# Altium PCB PCB1.PcbDoc (part 2 of 2)
Units mm, origin at the board's own origin, x right, y up, seen from the top; angles counter-clockwise.
Board outline 100 x 100 mm, 4 copper layers (Top Layer, GND, PWR, Bottom Layer), stack 0.603 mm thick; 73 components, 79 nets, 277 pads, 87 vias.
Unrouted connection lines stored in the file: 25.
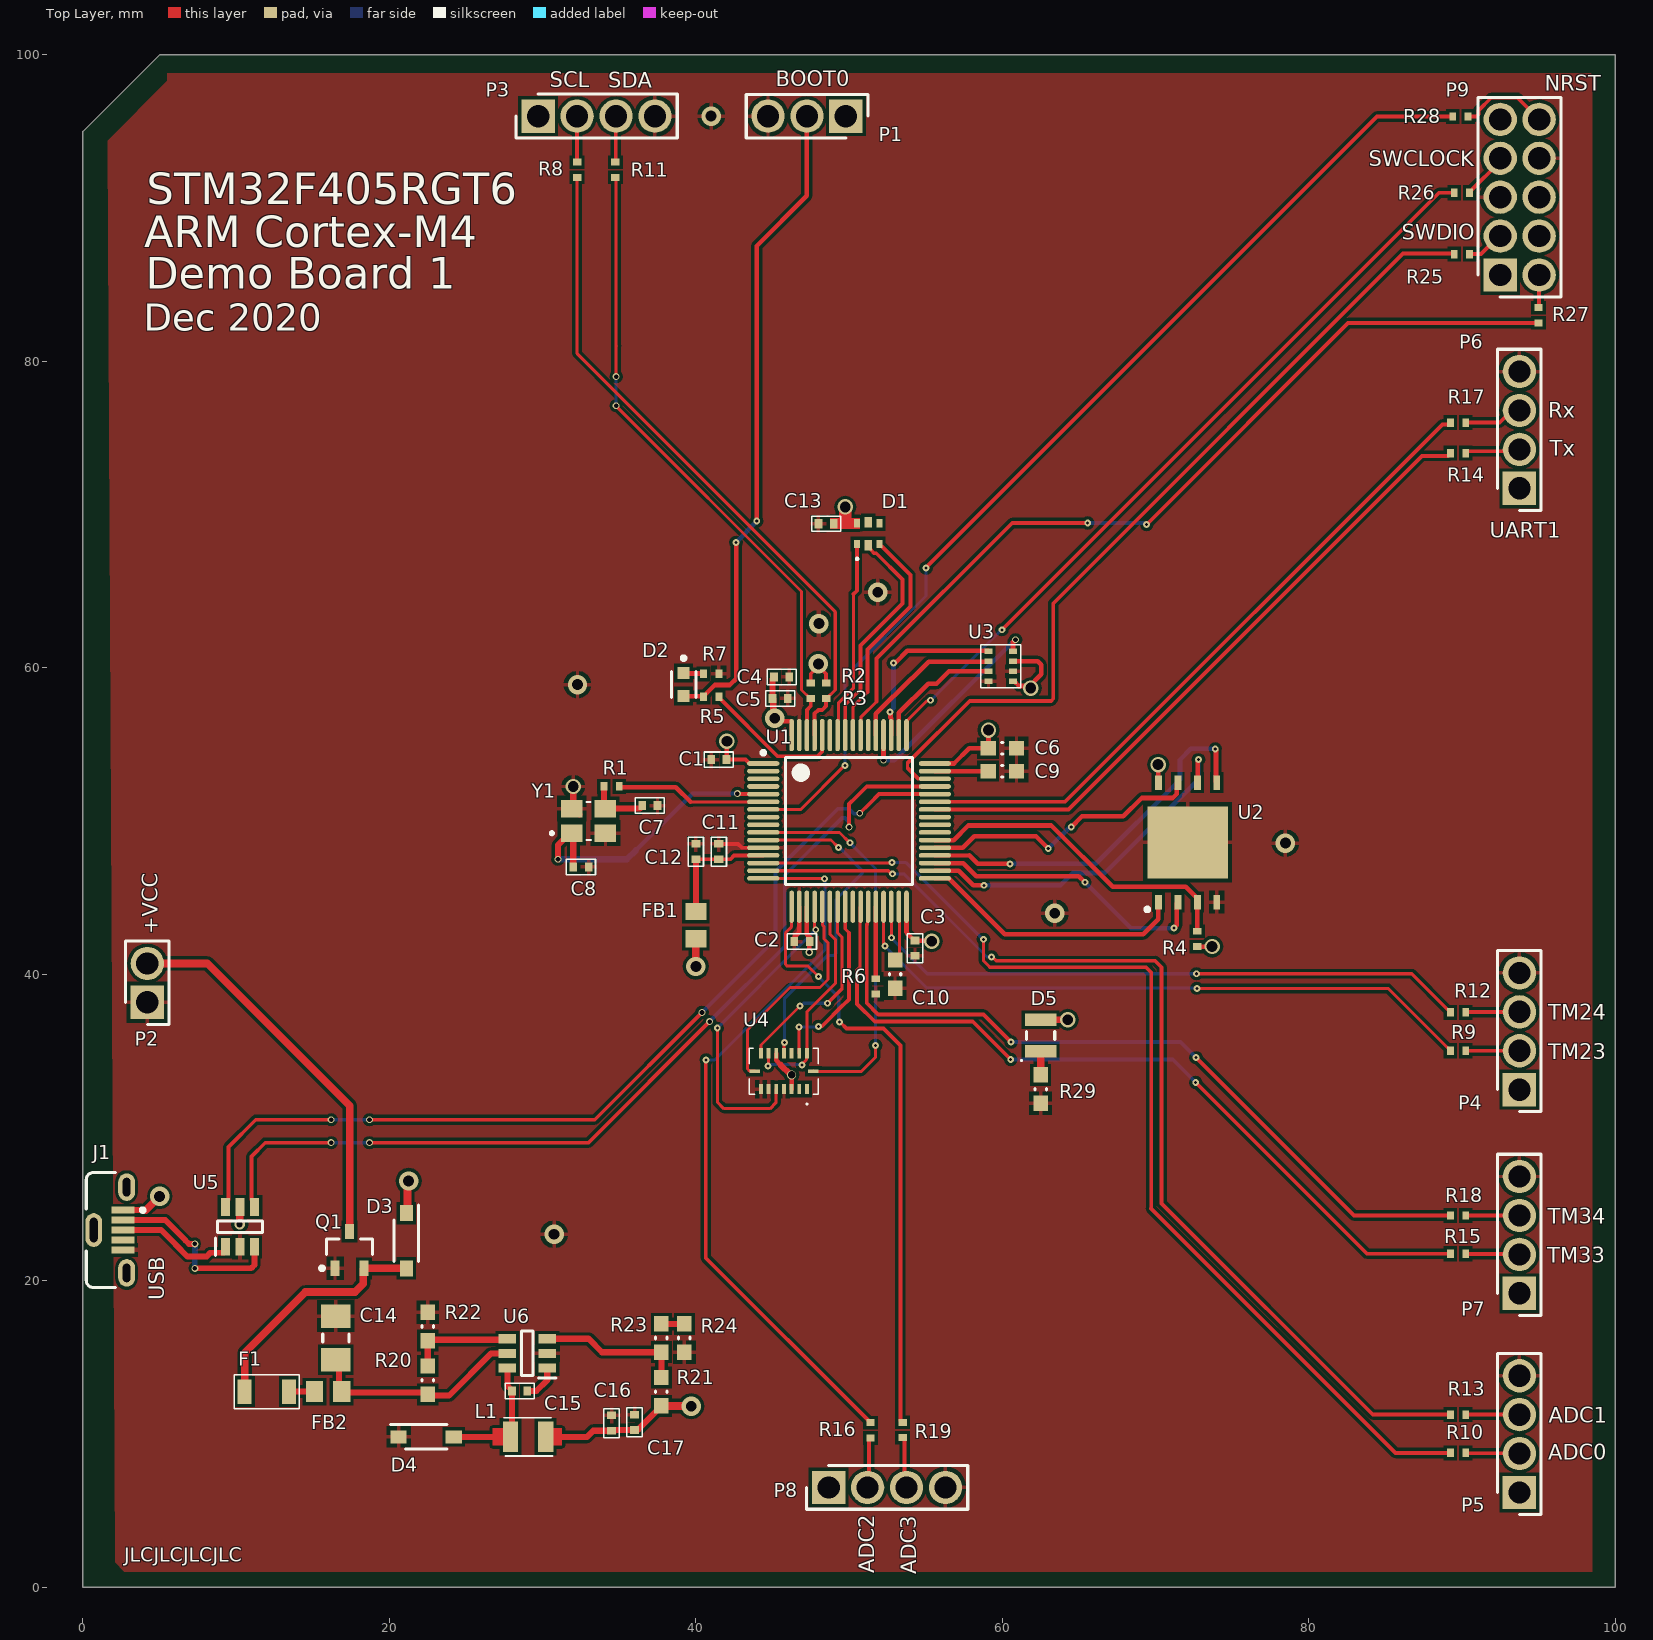
[diagram p0: Top Layer view]

## Polygon pours and split planes (outlines as drawn) (continued)
GND on GND (split plane): 38.304,53.196 38.682,52.818 38.697,52.808 38.707,52.801 38.736,52.795 43.196,52.795 44.124,51.868 44.124,50.876 41.237,50.876 41.208,50.871 41.196,50.862 41.183,50.854 40.393,50.063 40.008,49.679 38.196,47.867 38.179,47.842 38.174,47.813 38.174,46.076 30.076,46.076 30.076,49.674 30.174,49.674 30.174,46.237 30.179,46.207 30.196,46.183 30.221,46.166 30.25,46.16 37.954,46.16 37.983,46.166 38.008,46.183 38.025,46.207 38.031,46.237 38.031,47.922 40.805,50.697 41.009,50.901 41.01,50.901 41.035,50.918 41.089,50.972 43.9,50.972 43.929,50.978 43.954,50.994 43.971,51.019 43.976,51.049 43.976,51.798 43.971,51.827 43.962,51.84 43.954,51.852 43.252,52.554 43.227,52.571 43.198,52.576 38.707,52.576 37.754,53.529 37.729,53.546 37.7,53.551 30.25,53.551 30.221,53.546 30.196,53.529 30.179,53.504 30.174,53.475 30.174,50.326 30.076,50.326 30.076,53.624 37.876,53.624
GND on GND (split plane): 99.49,0.51 0.51,0.51 0.51,94.789 5.211,99.49 99.49,99.49
+5V on PWR (split plane): 28.748,21.896 28.748,16.604 23.396,11.252 1.752,11.252 1.752,28.248 22.396,28.248
+3V3 on PWR (split plane): 99.49,0.51 0.51,0.51 0.51,94.789 5.211,99.49 99.49,99.49

## Other copper
Top Layer:
  region net +3V3: 48.774,69.075 50.7,69.075 50.7,69.761 50.136,69.762 50.136,70.325 50.136,70.725 49.35,70.725 49.35,70.325 49.35,69.761 48.761,69.761
GND (plane layer: these items are gaps in the copper):
  lines w0.15: 30,46 38.25,46 38.25,47.813 40.062,49.625 40.447,50.009 41.237,50.8 41.523,50.8 42.46,50.8 44.2,50.8 44.2,51.9 43.228,52.872 38.736,52.872 38.358,53.25 37.908,53.7 30,53.7 30,50.25 30.25,50.25 30.25,53.475 37.7,53.475 38.675,52.5 43.198,52.5 43.9,51.798 43.9,51.049 41.058,51.049 40.981,50.972 40.972,50.972 40.751,50.751 37.954,47.954 37.954,46.237 36.063,46.237 30.25,46.237 30.25,49.75 30,49.75 30,46
PWR (plane layer: these items are gaps in the copper):
  lines w0.5: 1.5,11 23.5,11 29,16.5 29,22 22.5,28.5 1.5,28.5 1.5,11

## Silkscreen, mask and mechanical layers (free items; w line width, h text height)
Top Overlay:
  text "BOOT0" at 45.218,97.964 h1
  text "SCL" at 30.459,97.871 h1
  text "SDA" at 34.269,97.844 h1
  text "NRST" at 95.413,97.671 h1
  text "SWCLOCK" at 83.921,92.715 h1
  text "STM32F405RGT6" at 4.161,89.573 h3.5
  text "SWDIO" at 86.076,87.935 h1
  text "ARM Cortex-M4" at 3.995,86.764 h3.5
  text "Demo Board 1" at 4.089,84.058 h3.5
  text "Dec 2020" at 3.973,81.403 h3
  text "Rx" at 95.65,76.3 h1
  text "Tx" at 95.746,73.851 h1
  text "UART1" at 91.814,68.47 h1
  text "+VCC" at 4.896,42.595 h1 r90
  text "TM24" at 95.622,37.02 h1
  text "TM23" at 95.634,34.439 h1
  text "TM34" at 95.615,23.715 h1
  text "TM33" at 95.574,21.159 h1
  text "USB" at 5.308,18.722 h1 r90
  text "ADC1" at 95.661,10.706 h1
  text "ADC0" at 95.642,8.303 h1
  text "JLCJLCJLCJLC" at 2.677,1.634 h0.9
  text "ADC2" at 51.639,0.887 h1 r90
  text "ADC3" at 54.382,0.842 h1 r90